# Altium PCB arduino-to-headers-shield.PcbDoc
Units mil, origin at the board's own origin, x right, y up, seen from the top; angles counter-clockwise.
Board outline 2800 x 2100 mil, 2 copper layers (Top Layer, Bottom Layer); 12 components, 22 nets, 62 pads, 3 vias.
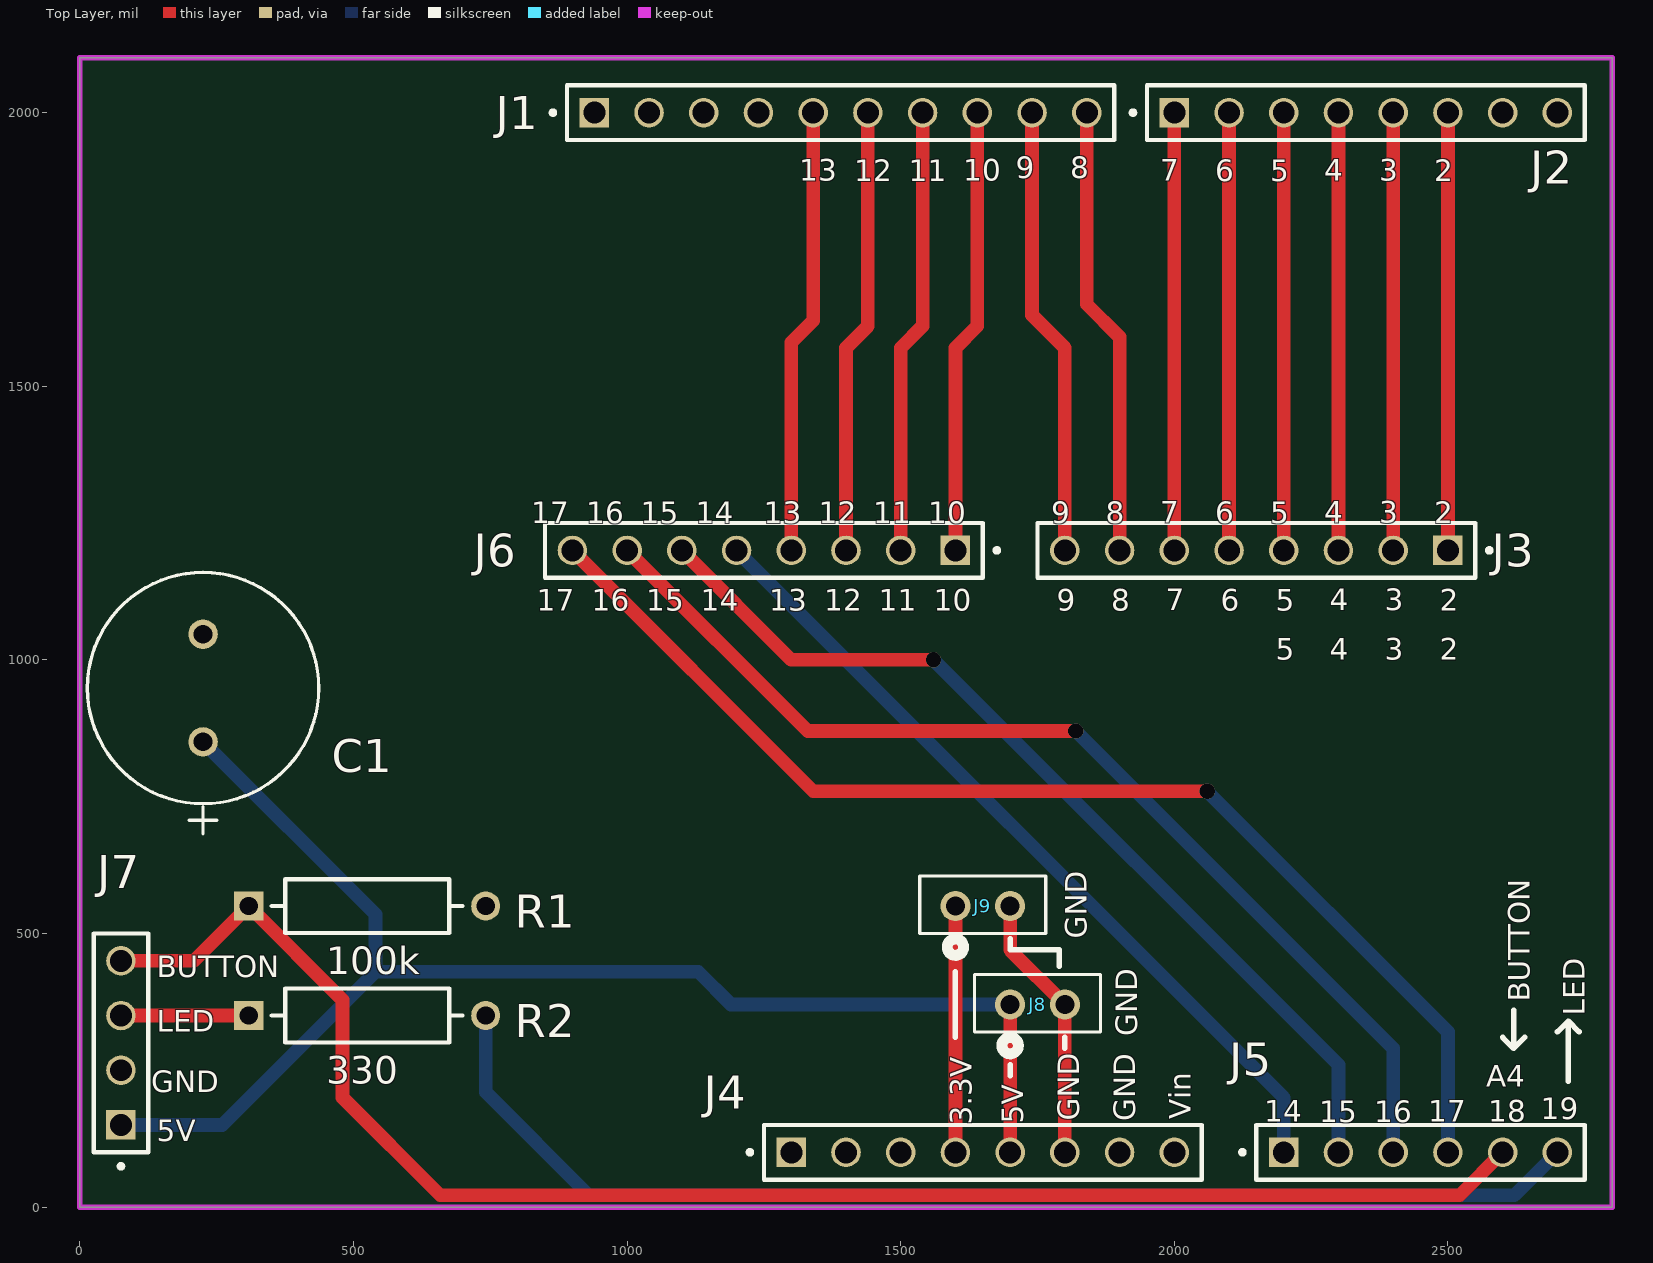
[diagram p0: Top Layer view]
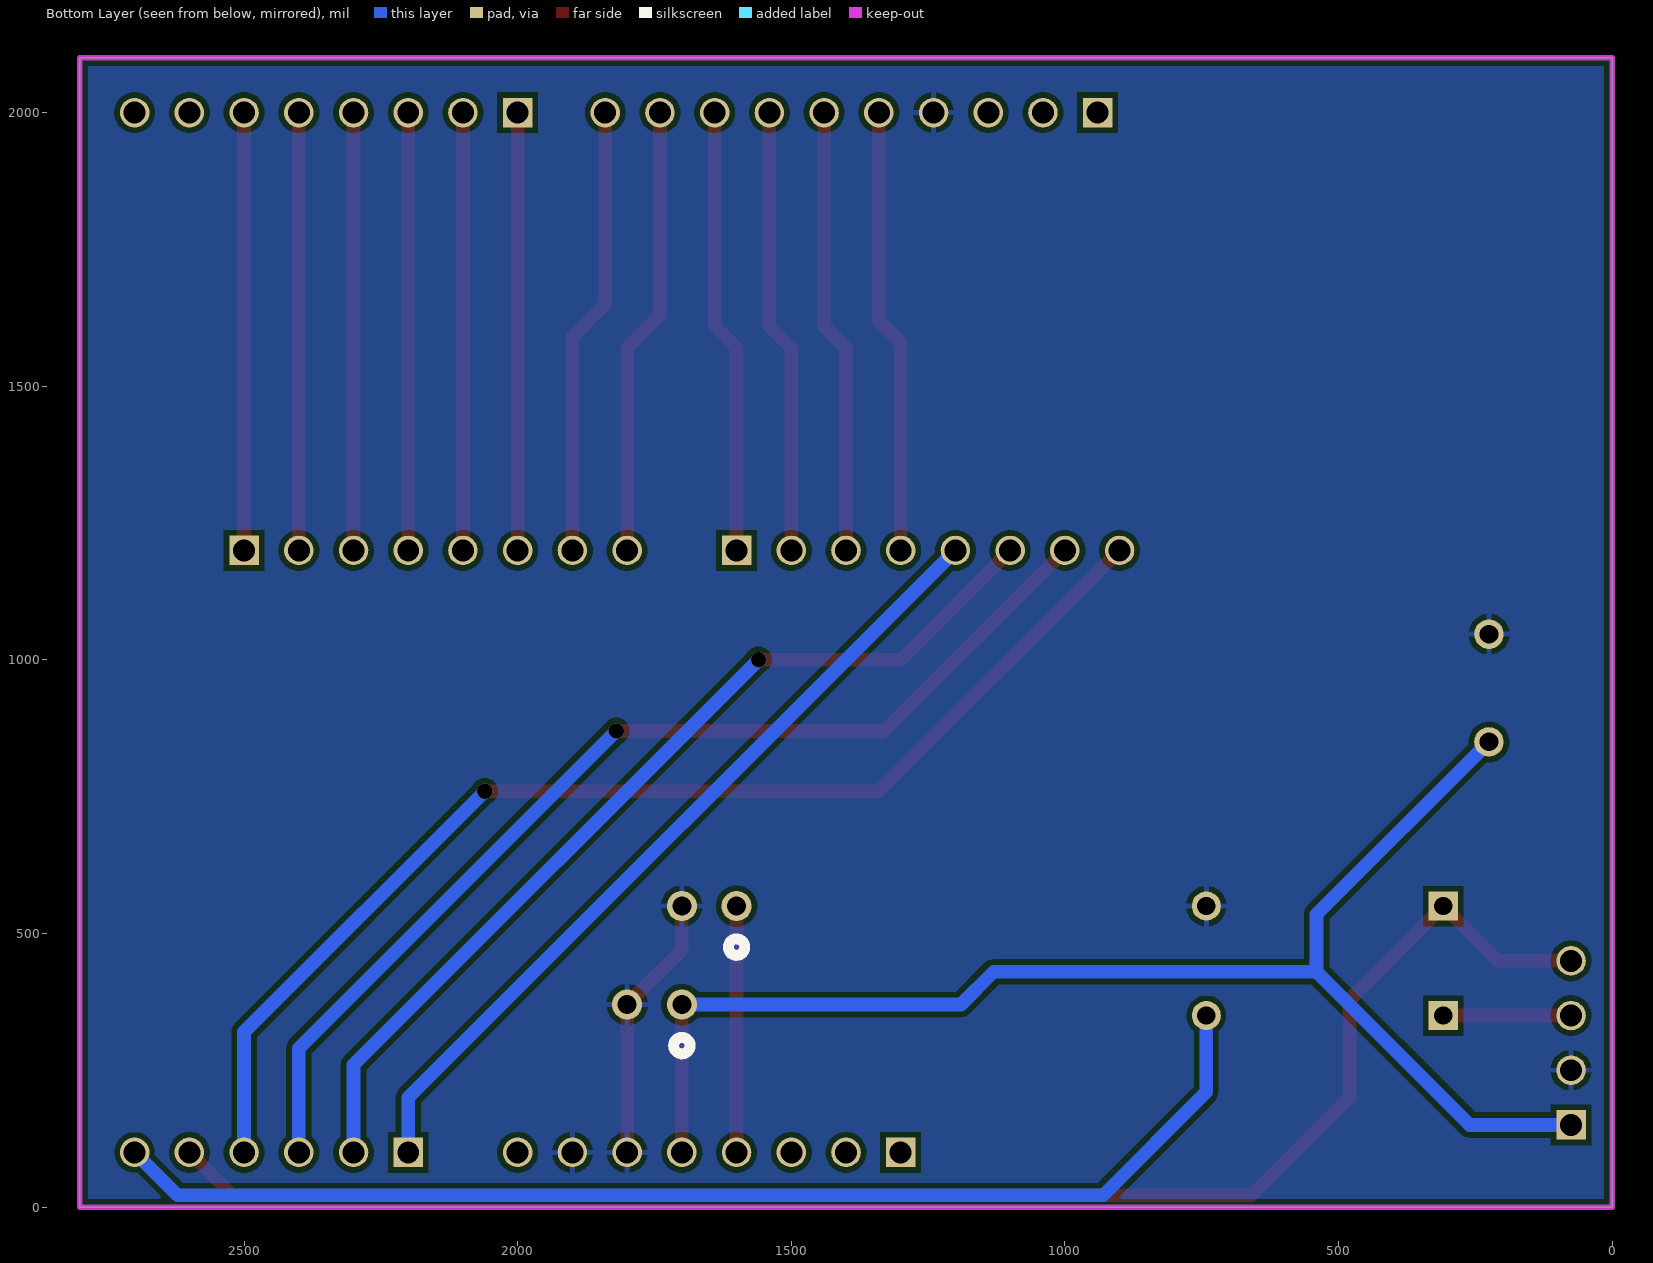
[diagram p1: Bottom Layer view, seen from below]
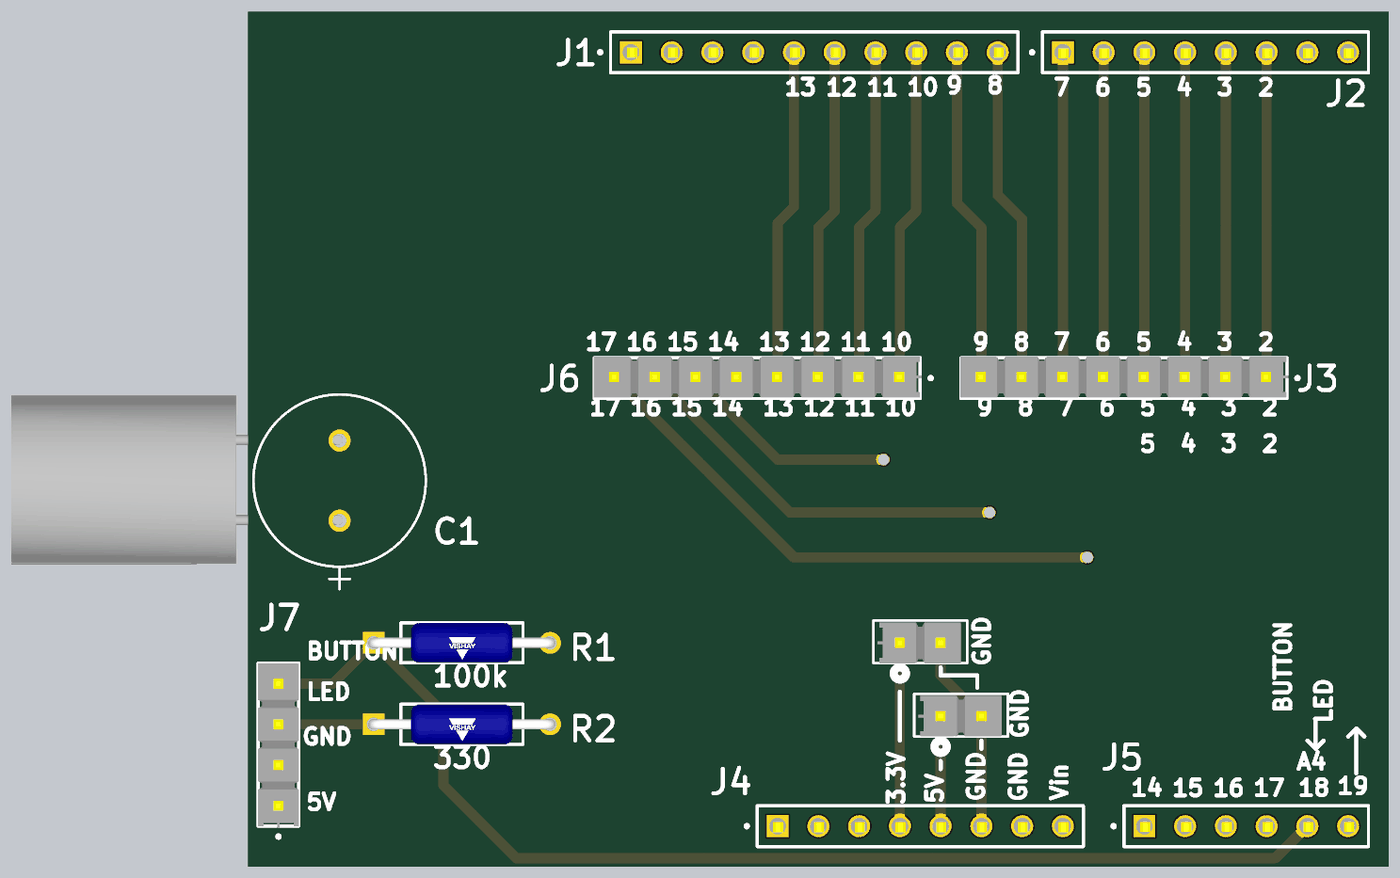
[diagram p2: 3D render of the assembled board from above, using the file's embedded part models]

## Layer stack, top to bottom
Top Solder: solder mask 0.4, Solder Resist, Dk 3.5
Top Layer: signal copper 1.4
Dielectric 1: dielectric 12.6, FR-4, Dk 4.8
Bottom Layer: signal copper 1.4
Bottom Solder: solder mask 0.4, Solder Resist, Dk 3.5

## Board outline
0,0 0,2100 2800,2100 2800,0

## Design rules (kind name [scope] priority, off if disabled: settings)
Clearance [All] p1: gap=10 ignorepadtopadclearanceinfootprint=FALSE except(0: Arc-Hole Track-Hole SMDPad-Hole THPad-Hole Via-Hole Fill-Hole Poly-Hole Region-Hole Text-Hole; 4: Arc-Arc Arc-Track Arc-SMDPad Track-Track Track-SMDPad SMDPad-SMDPad)
PolygonConnect [All] p1: connectstyle=Relief reliefconductorwidth=10 reliefentries=4 polygonreliefangle="90 Angle" airgapwidth=10
RoutingVias [All] p1: holewidth=28 width=50 viastyle="Through Hole" minholewidth=28 minwidth=50 maxholewidth=28 maxwidth=50
SolderMaskExpansion [All] p1: expansion=4 istentingtop=FALSE
Width [All] p1: maxlimit=35 minlimit=10 preferedwidth=25 minimp=50.000000 maximp=50.000000 favimp=50.000000
30 further rules are at their usual default settings.

## Components (designator, comment, footprint, x,y, rotation, side; value= is the part's Value field where it differs from the comment)
C1 "16PK1000MEFC10X12.5" CAP_PKPZ_10X12P5_LOW_RUB 225,850 r90 top
J1 "TSW-110-07-G-S" SAMTEC_TSW-110-07-G-S 1390,2000 r0 top
J2 "TSW-108-07-G-S" SAMTEC_TSW-108-07-G-S 2350,2000 r0 top
J3 "TSW-108-07-G-S-topside" SAMTEC_TSW-108-07-G-S-topside 2150,1200 r180 top
J4 "TSW-108-07-G-S" SAMTEC_TSW-108-07-G-S 1650,100 r0 top
J5 "TSW-106-07-G-S" SAMTEC_TSW-106-07-G-S 2450,100 r0 top
J6 "TSW-108-07-G-S-topside" SAMTEC_TSW-108-07-G-S-topside 1250,1200 r180 top
J7 "TSW-104-07-G-S-topside" SAMTEC_TSW-104-07-G-S-topside 75,300 r90 top
J8 "TSW-102-07-G-S" TSW-102-07-G-S-topside 1750,370 r0 top
J9 "TSW-102-07-G-S" TSW-102-07-G-S-topside 1650,550 r0 top
R1 "100k" FP-RLR07-MFG 525,550 r0 top
R2 "330 ohm" FP-RLR07-MFG 525,350 r0 top

## Footprints (in the part's own frame and the unit in brackets; to place one, negate y for a bottom-side part, rotate by r counter-clockwise, add the part's x,y. Pads: shape width x height; smd on the part's side, far side on the other; paste and mask are expansions set on the pad)
CAP_PKPZ_10X12P5_LOW_RUB [mil]
  round 54 / inner round 60 / far side round 54 hole 34 paste-99999 mask+0: 1(0,0) 2(196.85,0)
  silkscreen extent -168,-212 310,212, body extent -108,-8 306,806, height 120
FP-RLR07-MFG [mm]
  rect 1.35x1.35 hole 0.85 paste-2539.97 mask+0: 1(-5.5,0)
  round 1.35 hole 0.85 paste-2539.97 mask+0: 2(5.5,0)
  silkscreen extent -4.43,-1.25 4.43,1.25, body extent -6.27,-1.35 6.27,1.35, height 0.25
SAMTEC_TSW-104-07-G-S-topside [mm]
  rect 1.37x1.37 / inner round 1.37 / far side rect 1.37x1.37 hole 1.02: 01(-3.81,0)
  round 1.37 hole 1.02: 02(-1.27,0) 03(1.27,0) 04(3.81,0)
  silkscreen extent -5.83,-1.27 5.08,1.27, body extent -5.21,-1.27 5.08,1.27, height 8.38
SAMTEC_TSW-106-07-G-S [mm]
  rect 1.37x1.37 hole 1.02: 01(-6.35,0)
  round 1.37 hole 1.02: 02(-3.81,0) 03(-1.27,0) 04(1.27,0) 05(3.81,0) 06(6.35,0)
  silkscreen extent -8.37,-1.27 7.62,1.27, body extent -7.68,-1.32 7.68,1.22, height 1.34
SAMTEC_TSW-108-07-G-S [mm]
  rect 1.37x1.37 / inner round 1.37 / far side rect 1.37x1.37 hole 1.02: 01(-8.89,0)
  round 1.37 hole 1.02: 02(-6.35,0) 03(-3.81,0) 04(-1.27,0) 05(1.27,0) 06(3.81,0) 07(6.35,0) 08(8.89,0)
  silkscreen extent -10.91,-1.27 10.16,1.27, body extent -10.25,-1.34 10.2,1.2, height 1.34
SAMTEC_TSW-108-07-G-S-topside [mm]
  rect 1.37x1.37 / inner round 1.37 / far side rect 1.37x1.37 hole 1.02: 01(-8.89,0)
  round 1.37 hole 1.02: 02(-6.35,0) 03(-3.81,0) 04(-1.27,0) 05(1.27,0) 06(3.81,0) 07(6.35,0) 08(8.89,0)
  silkscreen extent -10.91,-1.27 10.16,1.27, body extent -10.25,-1.34 10.2,1.2, height 8.38
SAMTEC_TSW-110-07-G-S [mm]
  rect 1.37x1.37 / inner round 1.37 / far side rect 1.37x1.37 hole 1.02: 01(-11.43,0)
  round 1.37 hole 1.02: 02(-8.89,0) 03(-6.35,0) 04(-3.81,0) 05(-1.27,0) 06(1.27,0) 07(3.81,0) 08(6.35,0) 09(8.89,0) 10(11.43,0)
  silkscreen extent -13.45,-1.27 12.7,1.27, body extent -12.75,-1.3 12.78,1.24, height 1.34
TSW-102-07-G-S-topside [mil]
  round 55 / inner round 60 / far side round 55 hole 35 paste-99999 mask+0: 1(-50,0) 2(50,0)
  silkscreen extent -115,-90 115,55, body extent -105,-50 100,50, height 330

## Part data
C1: "No Description Available", Mfr_Name=Rubycon, Copyright="Copyright (C) 2024 Ultra Librarian. All rights reserved.", Manufacturer_Part_Number=16PK1000MEFC10X12.5, RefDes=RefDes, Type=DEV
J1 J5: Package=None, Availability=Unavailable, MF="Samtec Inc.", Price=None
  J1: MP=TSW-110-07-G-S
  J5: MP=TSW-106-07-G-S
J2 J3 J4 J6: "TSW - Samtec 2.54mm Pin Header 10.92mm Overall Pin Length (07) - Fast Stock", Package=None, Check_prices=https://www.snapeda.com/parts/TSW-108-07-G-S/Samtec+Inc./view-part/?ref=eda, MF="Samtec Inc.", MP=TSW-108-07-G-S, SnapEDA_Link=https://www.snapeda.com/parts/TSW-108-07-G-S/Samtec+Inc./view-part/?ref=snap
J7: "<a href=\"https://pricing.snapeda.com/parts/TSW-104-07-G-S/Samtec/view-part?ref=eda\">Check availability</a>", Package=None, Availability=Unavailable, MP=altium_native_batch, Price=None
J8 J9: library part TSW-102-07-G-S-topside, "No Description Available", Mfr_Name="Samtec Inc", Copyright="Copyright (C) 2024 Ultra Librarian. All rights reserved.", Manufacturer_Part_Number=TSW-102-07-G-S, RefDes=RefDes, Type=DEV
R1 R2: library part CMP-00030-39449004-1, "RLR07C1002FSB14 Fixed Resistor, Metal Film, 0.25W, 10000ohm, 250V, 1% +/-Tol, 100ppm/Cel, Through Hole Mount", Case/Package=Conformal, Max Operating Temperature=150°C, Max Power Dissipation=250mW, Min Operating Temperature=-65°C, Resistance=10kΩ, Temperature Coefficient=100ppm/°C, Tolerance=1%, Voltage Rating=250V, Composition="Metal Film", Contact Plating="Lead, Tin", Diameter=2.29mm, Failure Rate=0.001%, Features="Military, Moisture Resistant, Weldable", Lead Diameter=640µm, Lead Free="Contains Lead", Lead Length=38.1mm, Length=7.62mm, Military Standard=MIL-PRF-39017, Mount="Through Hole", NexarPartId=39449004, Number of Pins=14, Number of Terminations=2, Packaging=Bulk, Power Rating=250mW, Radiation Hardening=No, REACH SVHC=Unknown, RoHS=Non-Compliant, Schedule B="8533210090, 8533210090", Termination=Axial, Voltage Rating (DC)=250V, Width=2.29mm, Wire/Cable Diameter=50.8µm

## Via types
v1: diameter 28, hole 28, Top Layer to Bottom Layer, 3 vias

## Nets (pads, with @x,y where several pads share a name; then routed paths per layer and width w, separated by ;. In a path a pad name is that pad's centre, name@x,y a point inside that pad or via, vN(x,y) a via of type N, cw(c..) or ccw(c..) an arc to the next point about the centre after c; other vN are vias at no path point)
GND: C1.2 J1.04 J4.06 J4.07 J7.02 J8.2 J9.2 R1.2 | length 491.4
  Top Layer w25: J9.2 1700,470 J8.2 J4.06
NetC1_1: C1.1 J4.05 J7.01 J8.1 | length 2586.3
  Top Layer w25: J4.05 J8.1
  Bottom Layer w25: J7.01 260,150 540,430 ; C1.1 540,535 540,430 ; J8.1 1190,370 1130,430 540,430
NetJ1_05: J1.05 J6.04 | length 816.6
  Top Layer w25: J6.04 1300,1580 1340,1620 J1.05
NetJ1_06: J1.06 J6.03 | length 816.6
  Top Layer w25: J6.03 1400,1570 1440,1610 J1.06
NetJ1_07: J1.07 J6.02 | length 816.6
  Top Layer w25: J6.02 1500,1570 1540,1610 J1.07
NetJ1_08: J1.08 J6.01 | length 816.6
  Top Layer w25: J6.01 1600,1570 1640,1610 J1.08
NetJ1_09: J1.09 J3.08 | length 824.9
  Top Layer w25: J1.09 1740,1630 1800,1570 J3.08
NetJ1_10: J1.10 J3.07 | length 824.9
  Top Layer w25: J1.10 1840,1650 1900,1590 J3.07
NetJ2_01: J2.01 J3.06 | length 800
  Top Layer w25: J3.06 J2.01
NetJ2_02: J2.02 J3.05 | length 800
  Top Layer w25: J3.05 J2.02
NetJ2_03: J2.03 J3.04 | length 800
  Top Layer w25: J3.04 J2.03
NetJ2_04: J2.04 J3.03 | length 800
  Top Layer w25: J3.03 J2.04
NetJ2_05: J2.05 J3.02 | length 800
  Top Layer w25: J3.02 J2.05
NetJ2_06: J2.06 J3.01 | length 800
  Top Layer w25: J3.01 J2.06
NetJ4_04: J4.04 J9.1 | length 450
  Top Layer w25: J4.04 J9.1
NetJ5_01: J5.01 J6.05 | length 1514.2
  Bottom Layer w25: J6.05 2200,200 J5.01
NetJ5_02: J5.02 J6.06 | length 1749.4
  Top Layer w25: J6.06 1300,1000 v1(1560,1000)
  Bottom Layer w25: v1(1560,1000) 2300,260 J5.02
NetJ5_03: J5.03 J6.07 | length 1966.9
  Top Layer w25: J6.07 1330,870 v1(1820,870)
  Bottom Layer w25: v1(1820,870) 2400,290 J5.03
NetJ5_04: J5.04 J6.08 | length 2184.5
  Top Layer w25: J6.08 1340,760 v1(2060,760)
  Bottom Layer w25: v1(2060,760) 2500,320 J5.04
NetJ5_05: J5.05 J7.04 R1.1 | length 2922.4
  Top Layer w25: J7.04 208.46,450 R1.1 480,378.46 480,200 658.5,21.5 2521.5,21.5 J5.05
NetJ5_06: J5.06 R2.2 | length 2209.1
  Bottom Layer w25: R2.2 741.54,209.96 930,21.5 2621.5,21.5 J5.06
NetJ7_03: J7.03 R2.1 | length 233.5
  Top Layer w25: J7.03 R2.1
pads on no net: J1.01 J1.02 J1.03 J2.07 J2.08 J4.01 J4.02 J4.03 J4.08

## Polygon pours and split planes (outlines as drawn)
GND on Bottom Layer "NONET_L02_P-001" (solid, pour order 0): 0,0 0,2100 2800,2100 2800,0

## Keep-outs
Keep-Out Layer:
  lines w10: 0,0 0,525 0,1575 0,2100 2800,2100 2800,0 0,0

## Silkscreen, mask and mechanical layers (free items; w line width, h text height)
Top Overlay:
  lines w10: 1600,310 1600,430 ; 1700,240 1700,260 ; 1700,490 1700,470 1790,470 1790,450 1790,440 ; 1800,290 1800,310 ; 2600,310 2620,290 ; 2620,360 2620,290 ; 2640,310 2620,290 ; 2700,320 2720,340 ; 2720,230 2720,340 ; 2740,320 2720,340
  text "9" at 1710,1880 h39.37
  text "8" at 1810,1880 h39.37
  text "13" at 1314.12,1875.56 h39.37
  text "10" at 1614.12,1875.56 h39.37
  text "7" at 1974.12,1875.56 h39.37
  text "4" at 2274.12,1875.56 h39.37
  text "3" at 2374.12,1875.56 h39.37
  text "12" at 1415,1875 h39.37
  text "11" at 1515,1875 h39.37
  text "6" at 2075,1875 h39.37
  text "5" at 2175,1875 h39.37
  text "2" at 2475,1875 h39.37
  text "7" at 1974.12,1250.56 h39.37
  text "4" at 2274.12,1250.56 h39.37
  text "3" at 2374.12,1250.56 h39.37
  text "17" at 825,1250 h39.37
  text "16" at 925,1250 h39.37
  text "15" at 1025,1250 h39.37
  text "14" at 1125,1250 h39.37
  text "13" at 1250,1250 h39.37
  text "12" at 1350,1250 h39.37
  text "11" at 1450,1250 h39.37
  text "10" at 1550,1250 h39.37
  text "9" at 1775,1250 h39.37
  text "8" at 1875,1250 h39.37
  text "6" at 2075,1250 h39.37
  text "5" at 2175,1250 h39.37
  text "2" at 2475,1250 h39.37
  text "7" at 1984.12,1090.56 h39.37
  text "4" at 2284.12,1090.56 h39.37
  text "3" at 2384.12,1090.56 h39.37
  text "17" at 835,1090 h39.37
  text "16" at 935,1090 h39.37
  text "15" at 1035,1090 h39.37
  text "14" at 1135,1090 h39.37
  text "13" at 1260,1090 h39.37
  text "12" at 1360,1090 h39.37
  text "11" at 1460,1090 h39.37
  text "10" at 1560,1090 h39.37
  text "9" at 1785,1090 h39.37
  text "8" at 1885,1090 h39.37
  text "6" at 2085,1090 h39.37
  text "5" at 2185,1090 h39.37
  text "2" at 2485,1090 h39.37
  text "4" at 2284.12,1000.56 h39.37
  text "3" at 2384.12,1000.56 h39.37
  text "5" at 2185,1000 h39.37
  text "2" at 2485,1000 h39.37
  text "GND" at 1840,490 h39.37 r90
  text "100k" at 450,425 h50
  text "BUTTON" at 140,420 h39.37
  text "BUTTON" at 2650,375 h39.37 r90
  text "LED" at 2750,350 h39.37 r90
  text "LED" at 140,320 h39.37
  text "GND" at 1932.44,311.88 h39.37 r90
  text "330" at 450,225 h50
  text "A4" at 2570,220 h39.37
  text "GND" at 130,210 h39.37
  text "Vin" at 2030,160 h39.37 r90
  text "19" at 2670,160 h39.37
  text "GND" at 1825.84,157.79 h39.37 r90
  text "GND" at 1928.81,156.93 h39.37 r90
  text "14" at 2164.12,155.56 h39.37
  text "17" at 2464.12,155.56 h39.37
  text "18" at 2574.12,155.56 h39.37
  text "15" at 2265,155 h39.37
  text "16" at 2365,155 h39.37
  text "5V" at 1724.23,152.39 h39.37 r90
  text "3.3V" at 1630,150 h39.37 r90
  text "5V" at 140,120 h39.37